# Altium PCB PCB2.PcbDoc
Units mil, origin at the board's own origin, x right, y up, seen from the top; angles counter-clockwise.
Board outline 1653.54 x 984.25 mil, 2 copper layers (Top Layer, Bottom Layer); 30 components, 23 nets, 124 pads, 19 vias.
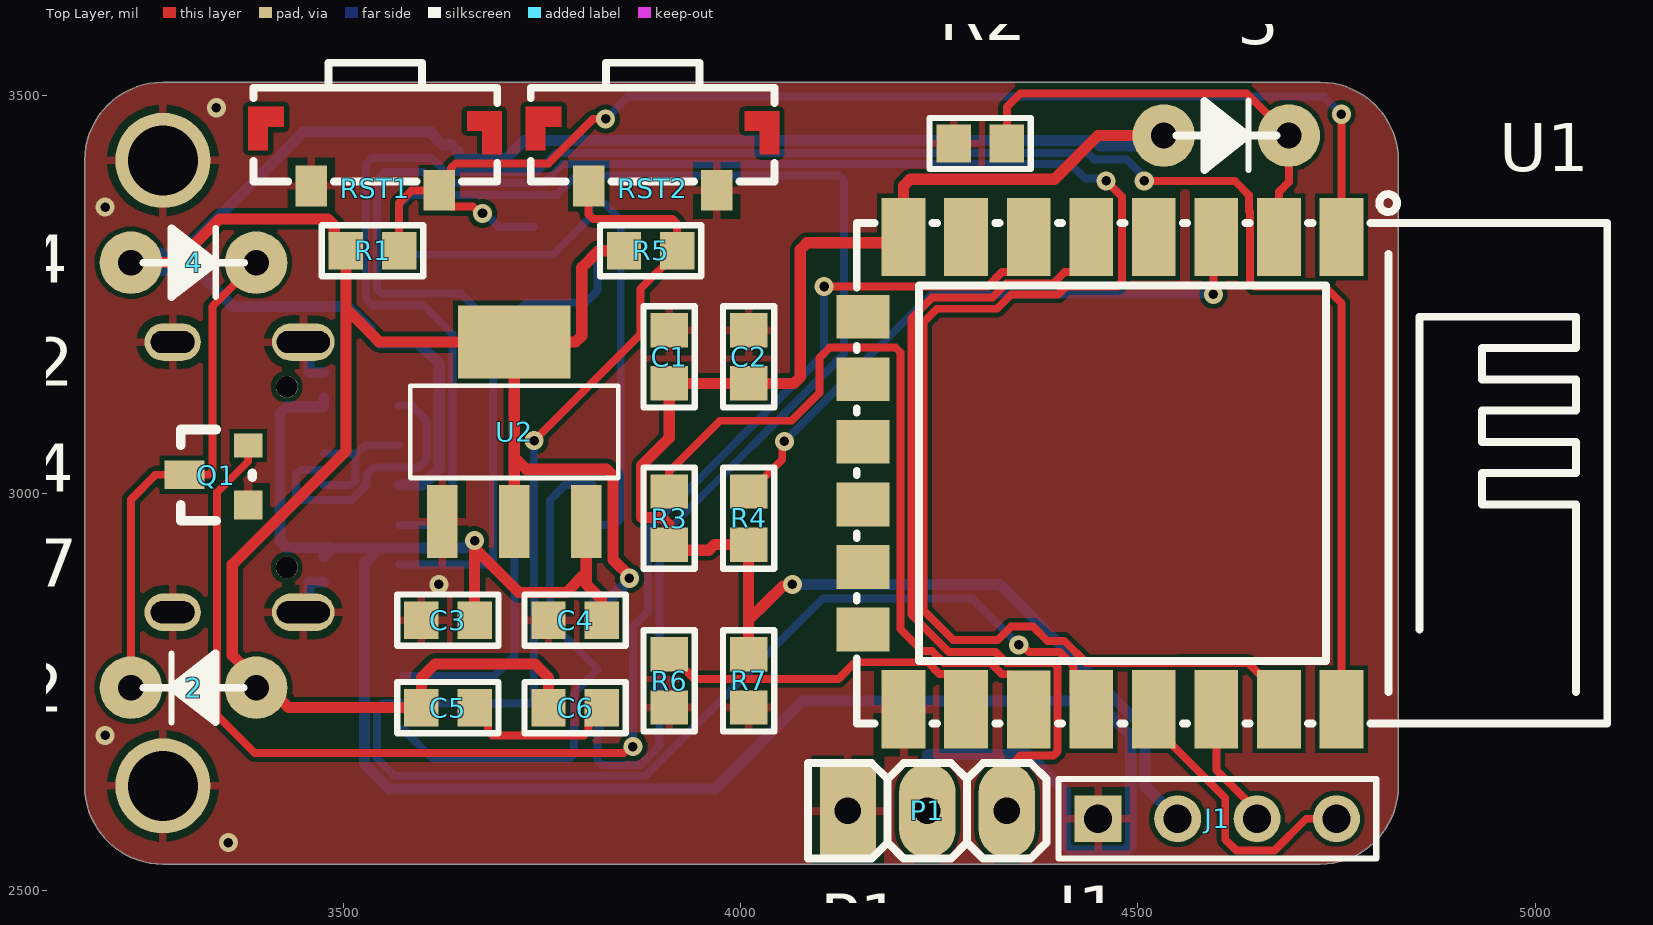
[diagram p0: Top Layer view]
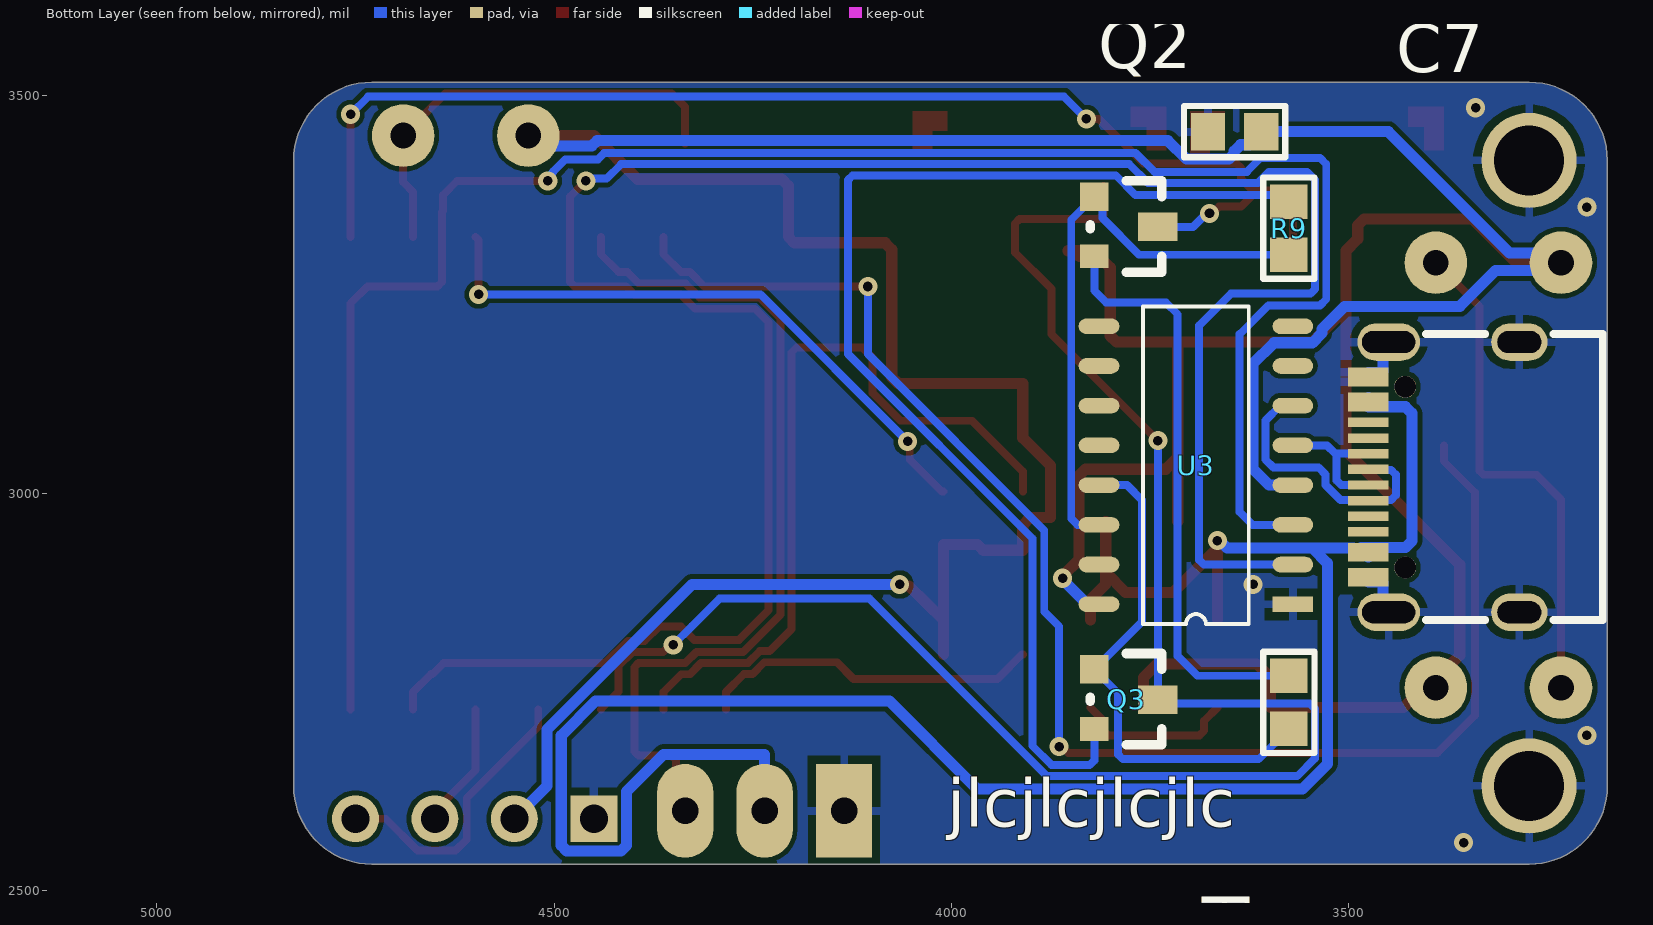
[diagram p1: Bottom Layer view, seen from below]

## Layer stack, top to bottom
Top Solder: solder mask 0.4, Solder Resist, Dk 3.5
Top Layer: signal copper 1.4
Dielectric 1: dielectric 12.6, FR-4, Dk 4.8
Bottom Layer: signal copper 1.4
Bottom Solder: solder mask 0.4, Solder Resist, Dk 3.5

## Board outline
3174.28,2631.28 3174.28,3418.68 cw(c3272.7,3418.68) 3272.7,3517.1 4729.39,3517.1 cw(c4729.39,3418.68) 4827.82,3418.68 4827.82,2631.28 cw(c4729.39,2631.28) 4729.39,2532.85 3272.7,2532.85 cw(c3272.7,2631.28)

## Design rules (kind name [scope] priority, off if disabled: settings)
Clearance [All] p1: gap=6 ignorepadtopadclearanceinfootprint=FALSE except(0: Arc-Text Arc-Hole Track-Text Track-Hole SMDPad-Text SMDPad-Hole THPad-Text THPad-Hole Via-Text Via-Hole Fill-Text Fill-Hole Poly-Text Poly-Hole Region-Text Region-Hole Text-Text Text-Hole; 4: Arc-Arc Arc-Track Arc-SMDPad Arc-THPad Track-Track Track-SMDPad Track-THPad SMDPad-SMDPad SMDPad-THPad THPad-THPad)
MinimumSolderMaskSliver [All] p1: minsoldermaskwidth=0
PolygonConnect [All] p1: thpad.connectstyle=Relief thpad.reliefconductorwidth=10 thpad.reliefentries=4 thpad.polygonreliefangle="90 Angle" thpad.airgapwidth=10 smdpad.connectstyle=Relief smdpad.reliefconductorwidth=10 smdpad.reliefentries=4 smdpad.polygonreliefangle="90 Angle" smdpad.airgapwidth=10 via.connectstyle=Direct via.reliefconductorwidth=10 via.reliefentries=4 via.polygonreliefangle="90 Angle" via.airgapwidth=10
RoutingVias [All] p1: holewidth=12 width=24 viastyle="Through Hole" minholewidth=8 minwidth=16 maxholewidth=28 maxwidth=50
SilkToSilkClearance [All] p1: silktosilkclearance=0
SilkToSolderMaskClearance [IsPad] p1: minsilkscreentomaskgap=0 clearancetoexposedcopper=TRUE
SolderMaskExpansion [All] p1: expansion=4 istentingtop=FALSE
Width Width_1 [(InNet('3V3') OR InNet('5V') OR InNet('GND'))] p1: maxlimit=20 minlimit=10 preferedwidth=14
Width [All] p2: maxlimit=10 minlimit=10 preferedwidth=10
27 further rules are at their usual default settings.

## Components (designator, comment, footprint, x,y, rotation, side; value= is the part's Value field where it differs from the comment)
2 "LED" D1 3390,2755 r180 top
3 "LED" D1 4532.52,3450 r0 top
4 "LED" D1 3232.52,3290 r0 top
C1 "1uF" 0603S 3910,3138.07 r90 top
C2 "1uF" 0603S 4010,3138.07 r90 top
C3 "1uF" 0603S 3598.07,2840 r0 top
C4 "1uF" 0603S 3758.07,2840 r0 top
C5 "1uF" 0603S 3598.07,2730 r0 top
C6 "1uF" 0603S 3758.07,2730 r0 top
C7 "1uF" 0603S 3676.93,3455 r180 bottom
J1 "CON4" HDR1X4 4450,2590 r0 top
P1 "Header_3" Header_3 4235,2600 r0 top
Q1 "NPN" SOT-23 3259.72,2937.24 r90 top
Q2 "NPN" SOT-23 3699.72,3420.76 r270 bottom
Q3 "NPN" SOT-23 3699.72,2825.76 r270 bottom
R1 "10k" 0603S 3503.07,3305 r0 top
R2 "10k" 0603S 4268.07,3440 r0 top
R3 "10k" 0603S 3910,2935 r90 top
R4 "10k" 0603S 4010,2935 r90 top
R5 "10k" 0603S 3853.07,3305 r0 top
R6 "10k" 0603S 3910,2730 r90 top
R7 "10k" 0603S 4010,2796.93 r270 top
R8 "10k" 0603S 3575,2770 r270 bottom
R9 "10k" 0603S 3575,3366.93 r270 bottom
RST1 "SW-PB" SW-SMD_TSA365G00-250 3540,3420 r0 top
RST2 "SW-PB" SW-SMD_TSA365G00-250 3889.29,3420 r0 top
U1 "ESP-12F(ESP8266MOD)" WIFIM-SMD_ESP-12F-ESP8266MOD 4455,3025 r180 top
U2 "AMS1117-3.3" SOT-223-3_L6.7-W3.7-P2.30-LS7.0-BR 3715,3077.01 r270 top
U3 "CH340C/G" SOP16 3570,2860 r0 bottom
USB1 "KH-TYPE-C-16P" USB-C-SMD_KH-TYPE-C-16P 3380,3020 r90 bottom

## Footprints (in the part's own frame and the unit in brackets; to place one, negate y for a bottom-side part, rotate by r counter-clockwise, add the part's x,y. Pads: shape width x height; smd on the part's side, far side on the other; paste and mask are expansions set on the pad)
0603S [mm]
  rect 1.1x1.2 smd: 1(0,0) 2(1.7,0)
  silkscreen extent -0.77,-0.82 2.47,0.82
D1 [mm]
  round 2 hole 0.82: 1(0,0) 2(4,0)
  silkscreen extent 0.4,-1.1 3.61,1.11
HDR1X4 [mm] "Connector; Header; 4 Position"
  rect 1.5x1.5 hole 0.9: 1(0,0)
  round 1.5 hole 0.9: 2(2.54,0) 3(5.08,0) 4(7.62,0)
  silkscreen extent -1.27,-1.27 8.89,1.27
Header_3 [mm] "插针"
  rect 1.8x3 hole 0.85: 1(-2.54,0)
  oval 1.8x3 hole 0.85: 2(0,0) 3(2.54,0)
  silkscreen extent -3.81,-1.52 3.81,1.52, body extent -3.81,-1.27 3.81,1.27, height 8.54
SOP16 [mm]
  rect 1.3x0.5 smd: 1(0,0)
  oval 1.3x0.5 smd: 2(0,-1.27) 3(0,-2.54) 4(0,-3.81) 5(0,-5.08) 6(0,-6.35) 7(0,-7.62) 8(0,-8.89) 9(6.2,-8.89) 10(6.2,-7.62) 11(6.2,-6.35) 12(6.2,-5.08) 13(6.2,-3.81) 14(6.2,-2.54) 15(6.2,-1.27) 16(6.2,0)
  silkscreen extent 1.41,-9.53 4.79,0.64
SOT-23 [mil]
  rect 36x36 smd: 1(47.76,-120.28)
  rect 30x36 smd: 2(122.76,-120.28)
  rect 36x50 smd: 3(85.76,-40.28)
  silkscreen extent 28,-125 143,-35
SOT-223-3_L6.7-W3.7-P2.30-LS7.0-BR [mm]
  rect 2.34x0.98 smd mask+0.051: 1(2.87,-2.3) 2(2.87,0) 3(2.87,2.3)
  rect 2.34x3.6 smd mask+0.051: 4(-2.87,0)
  silkscreen extent -1.47,-3.33 1.47,3.33
SW-SMD_TSA365G00-250 [mm]
  rect 1x1.3 smd: 1(-2.05,-0.85) 2(2.05,-0.99)
  Top Layer region: 2.935,1.54 4.045,1.54 4.045,0.16 3.425,0.16 3.425,0.92 2.935,0.92
  Top Layer region: -4.06,1.68 -2.92,1.68 -2.92,1.04 -3.43,1.04 -3.43,0.3 -4.06,0.3
  silkscreen extent -3.9,-0.71 3.9,3.09
USB-C-SMD_KH-TYPE-C-16P [mm]
  oval 1.2x2 hole 0.7 slot 1.7 at 90 deg: 1(-4.32,1.765) 2(4.32,1.765)
  oval 1.2x1.8 hole 0.7 slot 1.4 at 90 deg: 3(-4.32,-2.415) 4(4.32,-2.415)
  rect 0.3x1.3 smd: A1(-3.35,2.415) A4(-2.55,2.415) A5(-1.25,2.415) A6(-0.25,2.415) A7(0.25,2.415) A8(1.25,2.415) A9(2.55,2.415) A12(3.35,2.415) B1(3.05,2.415) B4(2.25,2.415) B5(1.75,2.415) B6(0.75,2.415) B7(-0.75,2.415) B8(-1.75,2.415) B9(-2.25,2.415) B12(-3.05,2.415)
  round 0.7 hole 0.7 unplated: ""(-2.89,1.235) ""(2.89,1.235)
  silkscreen extent -4.57,-5.08 4.57,0.57
WIFIM-SMD_ESP-12F-ESP8266MOD [mm]
  rect 1.4x2.5 smd: 1(-7.651,-7.552) 2(-5.651,-7.552) 3(-3.651,-7.552) 4(-1.651,-7.552) 5(0.349,-7.552) 6(2.349,-7.552) 7(4.349,-7.552) 8(6.349,-7.551) 9(6.349,7.549) 10(4.349,7.55) 11(2.349,7.551) 12(0.349,7.551) 13(-1.651,7.55) 14(-3.651,7.551) 15(-5.651,7.55) 16(-7.651,7.551)
  rect 1.7x1.4 smd: 17(7.65,-5) 18(7.649,-3.002) 19(7.649,-1.003) 20(7.649,0.998) 21(7.649,2.997) 22(7.65,4.997)
  silkscreen extent -16.15,-8.92 7.85,8

## Part data
C1 C2 C3 C4 C5 C6 C7: library part 电容0805, "电容0805"
J1: "Connector"
P1: "插针", Comm=插针3
Q1 Q2 Q3: "triode"
R1 R2 R3 R4 R5 R6 R7 R8 R9: library part RES
RST1 RST2: "微动开关，轻触按键"
U1: BOM_JLCPCB Part Class="Extended Part", BOM_Manufacturer=Ai-Thinker, BOM_Manufacturer Part=ESP-12F(ESP8266MOD), BOM_Supplier=LCSC, BOM_Supplier Part=C82891, spicePre=U, spiceSymbolName=ESP-12F(ESP8266MOD)
U2: JLCPCB Part Class="Extended Part", Manufacturer=JSMSEMI(杰盛微), Add into BOM=yes, Convert to PCB=yes, Datasheet=https://atta.szlcsc.com/upload/public/pdf/source/20211201/578FEEF9766904D398893791CE3EC879.pdf, Device=AMS1117-3.3, LCSC Part Name=AMS1117-3.3, Manufacturer Part=AMS1117-3.3, Name=AMS1117-3.3, Output Type=-, Supplier=LCSC, Supplier Footprint=SOT-223, Supplier Part=C917183, Symbol=AMS1117-3.3_C917183
U3: library part CH340G, "USB转COM口"
USB1: BOM_JLCPCB Part Class="Extended Part", BOM_Manufacturer="Shenzhen Kinghelm Elec", BOM_Manufacturer Part=KH-TYPE-C-16P, BOM_Supplier=LCSC, BOM_Supplier Part=C709357, Contributor=LCSC, spicePre=U, spiceSymbolName=KH-TYPE-C-16P

## Free pads (board coordinates)
  round 120 hole 88: 5(3272.7,2631.28) 6(3272.7,3418.68)

## Via types
v1: diameter 24, hole 12, Top Layer to Bottom Layer, 19 vias

## Nets (pads, with @x,y where several pads share a name; then routed paths per layer and width w, separated by ;. In a path a pad name is that pad's centre, name@x,y a point inside that pad or via, vN(x,y) a via of type N, cw(c..) or ccw(c..) an arc to the next point about the centre after c; other vN are vias at no path point)
3V3: 2.1 3.1 4.1 C1.1 C2.1 C5.1 C6.1 C7.2 J1.2 R1.1 R3.1 R4.1 R5.1 R7.1 U1.8 U2.2 U2.4 U3.4 U3.16 | length 6589.4
  Top Layer w14: 4.1 3289,3290 3344,3345 3480.22,3345 3488.42,3336.8 3488.42,3319.65 R1.1 3503.07,3232 ; U2.2 3715,3045 ; C6.1 3758.07,2768 3741.07,2785 3615.07,2785 3598.07,2768 C5.1 3430.57,2730 3405.57,2755 2.1 3390,2765.57 3360,2795.57 3360,2910 3503.07,3053.07 3503.07,3232 ; R5.1@3838.42,3297.62 R5.1 3820.93,3305 3800,3284.07 3800,3198 3792,3190 U2.4 ; v1(3860,2892.71) 3860,2895.41 3839.38,2916.03 3839.38,3021.8 3831.18,3030 3730,3030 3715,3045 ; R7.1 4010,2840 ; v1(4065,2885) 4063.09,2883.09 4053.09,2883.09 4031.54,2861.54 4010,2840 ; 3.1 4450,3450 4395,3395 4213.22,3395 4205.02,3386.8 U1.8 4197.75,3315 4083.2,3315 4075,3306.8 4075,3146.27 4066.8,3138.07 C2.1 C1.1 3910,3069.21 3875.38,3034.58 3875.38,2969.28 3900.72,2969.28 3910,2960 R3.1 3910,2928 3960,2928 3967,2935 R4.1 4010,2840 ; 3503.07,3232 3545.07,3190 U2.4 ; 3715,3045 U2.4
  Bottom Layer w14: U3.4 3600,3010 3620.59,3030.59 3620.59,3162.41 3593.84,3189.16 3545.62,3189.16 3533.41,3201.37 3533.41,3206.59 3505,3235 3360,3235 3315,3280 3242.52,3280 4.1 3244.91,3302.39 3297.39,3302.39 3450,3455 C7.2 3610,3453.03 3624.65,3438.38 3636.08,3438.38 3644.28,3430.18 3644.28,3426.82 3650.72,3420.38 3704,3420.38 3727.62,3444 4445.63,3444 4452.63,3437 4519.52,3437 3.1 ; U3.16 3828.57,2860 3860,2891.43 v1(3860,2892.71) ; v1(4065,2885) 4326.46,2885 4509,2702.46 4509,2631 J1.2
5V: C3.2 C4.2 P1.2 U2.3 USB1.A4 USB1.A9 USB1.B4 USB1.B9 | length 2787.6
  Top Layer w14: C3.2 v1@3665,2931 ; v1(3665,2940) v1@3665,2931 ; U2.3 3805.55,2900 ; C4.2 3825,2866 3805.55,2885.45 3805.55,2900 ; v1@3665,2931 3721,2875 3780.55,2875 3805.55,2900
  Bottom Layer w14: USB1.A9 USB1.B4 3428.2,3108.58 3420,3100.38 3420,2939.62 3428.2,2931.42 USB1.B9 ; USB1.B9@3493.67,2930.84 3545.62,2930.84 ; v1(3665,2940) 3662.29,2940 3653.14,2930.84 3545.62,2930.84 ; P1.2 4235,2671 4362,2671 4409,2624 4409,2556.39 4415.92,2549.47 4484.08,2549.47 4491,2556.39 4491,2695 4448,2738 4078,2738 3967.57,2627.57 3558.04,2627.57 3526.38,2659.23 3526.38,2911.6 3545.62,2930.84 ; USB1.B9 3484.05,2931.42 3485.47,2930 USB1.A4 USB1.B9
DN: U3.6 USB1.A7 USB1.B7 | length 350.9
  Bottom Layer w10: USB1.A7 3474.18,3028.93 3446.35,3028.93 3440.49,3023.08 3440.49,2997.23 3446.35,2991.38 3474.18,2991.38 USB1.B7 3475.99,2991.38 3510.16,2991.38 3529,3010.22 3529,3023.4 3537.6,3032 3594.59,3032 3604.59,3042 3604.59,3091.41 3586,3110 U3.6
DP: U3.5 USB1.A6 USB1.B6 | length 175.1
  Bottom Layer w10: USB1.A6 3509.14,3010.16 3515,3016.02 3515,3049.53 ; USB1.B6 3516.53,3049.53 3527,3060 U3.5
DTR: Q3.1 R8.2 U3.13 | length 652.6
  Bottom Layer w10: R8.2 3613.07,2665 3784.14,2665 3790,2670.86 3790,2748 Q3.1 3760,2838 3760,2991 3779,3010 U3.13
EN: R4.2 U1.3 | length 773.3
  Top Layer w10: R4.2 4011.97,3001.93 4052.32,3042.28 4052.32,3062.32 v1(4055,3065) ; v1(4595,3250) 4595,3318.58 U1.3
  Bottom Layer w10: v1(4055,3065) 4240,3250 v1(4595,3250)
GND: C1.2 C2.2 C3.1 C4.1 C7.1 J1.1 P1.1 pad.5 pad.6 Q1.1 R2.1 R6.1 R7.2 RST1.1 RST2.2 U1.9 U2.1 U3.1 USB1.1 USB1.2 USB1.3 USB1.4 USB1.A1 USB1.A12 USB1.B1 USB1.B12 | length 118.1
  Bottom Layer w14: USB1.1 3456.49,2856.93 3456.49,2887.02 3457.59,2888.11 USB1.A1 ; USB1.2 3456.49,3183.07 3456.49,3152.98 3457.59,3151.89 USB1.A12
  other v1: 3355,2560 3200,2695 3620,2885 3200,3360 3340,3485
GPIO0: Q3.3 R5.2 RST2.1 U1.12 | length 2167.9
  Top Layer w10: v1(3740,3066) 3874,3200 3874,3257.03 3920,3303.03 R5.2 3920,3339 3914,3345 3814.44,3345 3808.58,3350.86 RST2.1 ; v1(4350,2808.91) 4353.79,2808.91 4362.7,2800 4401.42,2800 4418.68,2782.74 4418.68,2750.29 U1.12
  Bottom Layer w10: v1(3740,3066) Q3.3 3735,2735 3548.93,2735 3542.38,2728.45 3542.38,2665.86 3564.66,2643.57 3879.51,2643.57 4102.94,2867 4291.91,2867 4326.19,2832.72 v1(4350,2808.91)
GPIO2: R3.2 U1.11 | length 973.2
  Top Layer w10: R3.2 3910,3027 3974,3091 4064,3091 4099,3126 4099,3170 4112,3183 4195.14,3183 4201,3177.14 4201,2829 4229,2801 4241.13,2801 4256.17,2785.96 4315.05,2785.96 4329.1,2771.91 4339.94,2771.91 4362.5,2749.35 U1.11
GPIO15: R6.2 U1.10 | length 432.5
  Top Layer w10: R6.2 3911,2796.93 3941.93,2766 4123,2766 4144,2787 4235.33,2787 4250.37,2771.96 4261.2,2771.96 4283.76,2749.4 U1.10
IR: Q1.2 U1.6 | length 1877.1
  Top Layer w10: Q1.2 3380,3040 3341,3001 3341,2720 3388,2673 3852.82,2673 3860.52,2680.69 v1(3864.31,2680.69) ; v1(4105,3260) 4310.96,3260 4329.05,3278.09 4339.94,3278.09 4362.5,3300.65 U1.6
  Bottom Layer w10: v1(3864.31,2680.69) 3864.31,2832.2 3883,2850.89 3883,2953 4105,3175 v1(4105,3260)
Light: 3.2 R2.2 U1.2 | length 562.9
  Top Layer w10: R2.2 4335,3486 4352,3503 4637,3503 3.2 4690,3391.54 4677.46,3379 U1.2
Net2_2: 2.2 4.2 Q1.3 | length 639.2
  Top Layer w10: 2.2 3232.52,2992 3263.52,3023 Q1.3 3330,3023 3335,3028 3335,3235 4.2
NetC5_2: C5.2 C6.2 | length 203.6
  Top Layer w10: C5.2 3681.65,2713.35 3681.65,2700.86 3687.51,2695 3802.49,2695 3808.35,2700.86 3808.35,2713.35 C6.2
NetQ2_2: Q2.2 R8.1 | length 740.8
  Bottom Layer w10: R8.1 3690,2770 3715,2795 3715,3225 3730,3240 3805,3240 3820,3255 Q2.2
NetQ3_2: Q3.2 R9.1 | length 1512.6
  Bottom Layer w10: R9.1 3583.07,3375 3768,3375 3793,3400 4124.14,3400 4130,3394.14 4130,3175 3898,2943 3898,2681.86 3873.71,2657.57 3825.86,2657.57 3820,2663.43 Q3.2 Q3.2@3823,2703
RST: Q2.3 R1.2 RST1.2 U1.1 | length 1615.1
  Top Layer w10: R1.2 3570,3365.09 3585.83,3380.92 RST1.2 ; v1(3675,3352) 3671.21,3352 3662.78,3360.43 3635.39,3360.43 3620.71,3375.12 RST1.2 ; v1(3830,3471) 3814,3471 3758,3415 3641.25,3415 3635.39,3409.14 3635.39,3395.71 RST1.2 ; U1.1 v1(4756.2,3476.8)
  Bottom Layer w10: v1(3675,3352) 3678.79,3352 3695.79,3335 Q2.3 ; v1(3830,3471) 3858,3499 4734,3499 v1(4756.2,3476.8)
RTS: Q2.1 R9.2 U3.14 | length 740.2
  Bottom Layer w10: R9.2 3763.61,3300 3809.7,3346.09 3809.7,3362.7 Q2.1 3849,3344 3849,2968 3841,2960 U3.14
RX: U1.15 U3.2 | length 2958.7
  Top Layer w10: v1(4460,3393.05) 4480,3373.05 4480,3265.86 4474.14,3260 4409.5,3260 4399.59,3250.09 4340.65,3250.09 4322.56,3232 4247,3232 4230,3215 4230,2852.5 4267.5,2815 4323.56,2815 4340.47,2831.91 4368.09,2831.91 4386,2814 4407.22,2814 4435.25,2785.97 4551.27,2785.97 ; 4551.3,2785.94 4639.06,2785.94 4653.05,2771.95 4654.9,2771.95 4677.46,2749.39 U1.15
  Bottom Layer w10: U3.2 3682.14,2910 3688,2915.86 3688,3211 3648,3251 3548,3251 3542,3257 3542,3394 3552,3404 3600.38,3404 3614,3390.38 3752.38,3390.38 3776,3414 4415.63,3414 4433.91,3395.72 4457.32,3395.72 v1(4460,3393.05)
SCL: J1.3 U1.14 | length 159
  Top Layer w10: U1.14 4598.72,2651.28 4650,2600 J1.3
SDA: J1.4 U1.13 | length 363.4
  Top Layer w10: U1.13 4519.98,2706.1 4542.54,2683.55 4610,2616.09 4610,2564 4624,2550 4672,2550 4712,2590 J1.4
Servo: P1.3 U1.5 | length 1097.4
  Top Layer w10: P1.3 4346.32,2611.32 4346.32,2663.63 4352.18,2669.49 4393.79,2669.49 4399.06,2674.76 4399.06,2780.64 4393.79,2785.91 4334.9,2785.91 4320.85,2799.96 4261.97,2799.96 4215,2846.93 4215,3220 4241,3246 4316.76,3246 4334.85,3264.09 4393.79,3264.09 4407.79,3278.09 4418.68,3278.09 4441.24,3300.65 U1.5
TX: U1.16 U3.3 | length 2499.2
  Top Layer w10: v1(4508,3393) 4622,3393 4640,3375 4640,3355 4640.9,3354.1 4640.9,3265.86 4646.76,3260 4735,3260 4756.2,3238.8 U1.16
  Bottom Layer w10: U3.3 3621,2960 3637,2976 3637,3200 3601,3236 3536,3236 3528,3244 3528,3414 3536,3422 3610.38,3422 3628,3404.38 3744.38,3404.38 3768,3428 4437,3428 4445,3420 4486,3420 4501.41,3404.59 4501.41,3403.38 4508,3396.79 v1(4508,3393)
pads on no net: U1.4 U1.7 U1.17 U1.18 U1.19 U1.20 U1.21 U1.22 U3.7 U3.8 U3.9 U3.10 U3.11 U3.12 U3.15 USB1. USB1.A5 USB1.A8 USB1.B5 USB1.B8

## Polygon pours and split planes (outlines as drawn)
GND on Top Layer "NONET_L-01_P-001" (solid, remove dead copper, pour order 0): 3174.28,2631.28 3174.28,3418.68 cw(c3272.7,3418.68) 3272.7,3517.1 4729.39,3517.1 cw(c4729.39,3418.68) 4827.82,3418.68 4827.82,2631.28 cw(c4729.39,2631.28) 4729.39,2532.85 3272.7,2532.85 cw(c3272.7,2631.28)
GND on Bottom Layer "NONET_L-01_P-001" (solid, remove dead copper, pour order 1): 3174.28,2631.28 ccw(c3272.7,2631.28) 3272.7,2532.85 4729.39,2532.85 ccw(c4729.39,2631.28) 4827.82,2631.28 4827.82,3418.68 ccw(c4729.39,3418.68) 4729.39,3517.1 3272.7,3517.1 ccw(c3272.7,3418.68) 3174.28,3418.68

## Silkscreen, mask and mechanical layers (free items; w line width, h text height)
Bottom Overlay:
  text "String" at 4630,3689.99 h60
  text "jlcjlcjlcjlc" at 4005,2579.99 h60
Top Solder:
  text "*" at 4088.8,3445.71 h100
  text "*" at 4108.8,3345.71 h100
  text "*" at 4003.8,3270.71 h100
  text "*" at 3678.8,3265.71 h100
  text "*" at 3578.8,3205.71 h100
  text "*" at 3358.8,3120.71 h100
  text "*" at 3223.8,3090.71 h100
  text "*" at 3523.8,3065.71 h100
  text "*" at 3433.8,3030.71 h100
  text "*" at 3548.8,2950.71 h100
  text "*" at 3448.8,2915.71 h100
  text "*" at 3263.8,2900.71 h100
  text "*" at 3528.8,2855.71 h100
  text "*" at 3493.8,2750.71 h100
  text "WeatherStation V2.0" at 3357.19,2590 h66
Bottom Solder:
  drawing of 4297 lines, arcs and shapes, not listed
  text "S_XwX" at 4657.18,3096.57 h120
  text "Designed" at 4657.06,2970 h120
Mechanical 1:
  circle w5: c3272.7,2631.28 r39.37
  circle w5: c3272.7,3418.68 r39.37
  lines w5: 3174.28,2631.28 ccw(c3272.7,2631.28) 3272.7,2532.85 4729.39,2532.85 ccw(c4729.39,2631.28) 4827.82,2631.28 4827.82,3418.68 ccw(c4729.39,3418.68) 4729.39,3517.1 3272.7,3517.1 ccw(c3272.7,3418.68) 3174.28,3418.68 3174.28,2631.28